# Altium PCB PCB1.PcbDoc
Units mm, origin at the board's own origin, x right, y up, seen from the top; angles counter-clockwise.
Board outline 51.05 x 60.58 mm, 2 copper layers (Top Layer, Bottom Layer); 14 components, 9 nets, 34 pads, 0 vias.
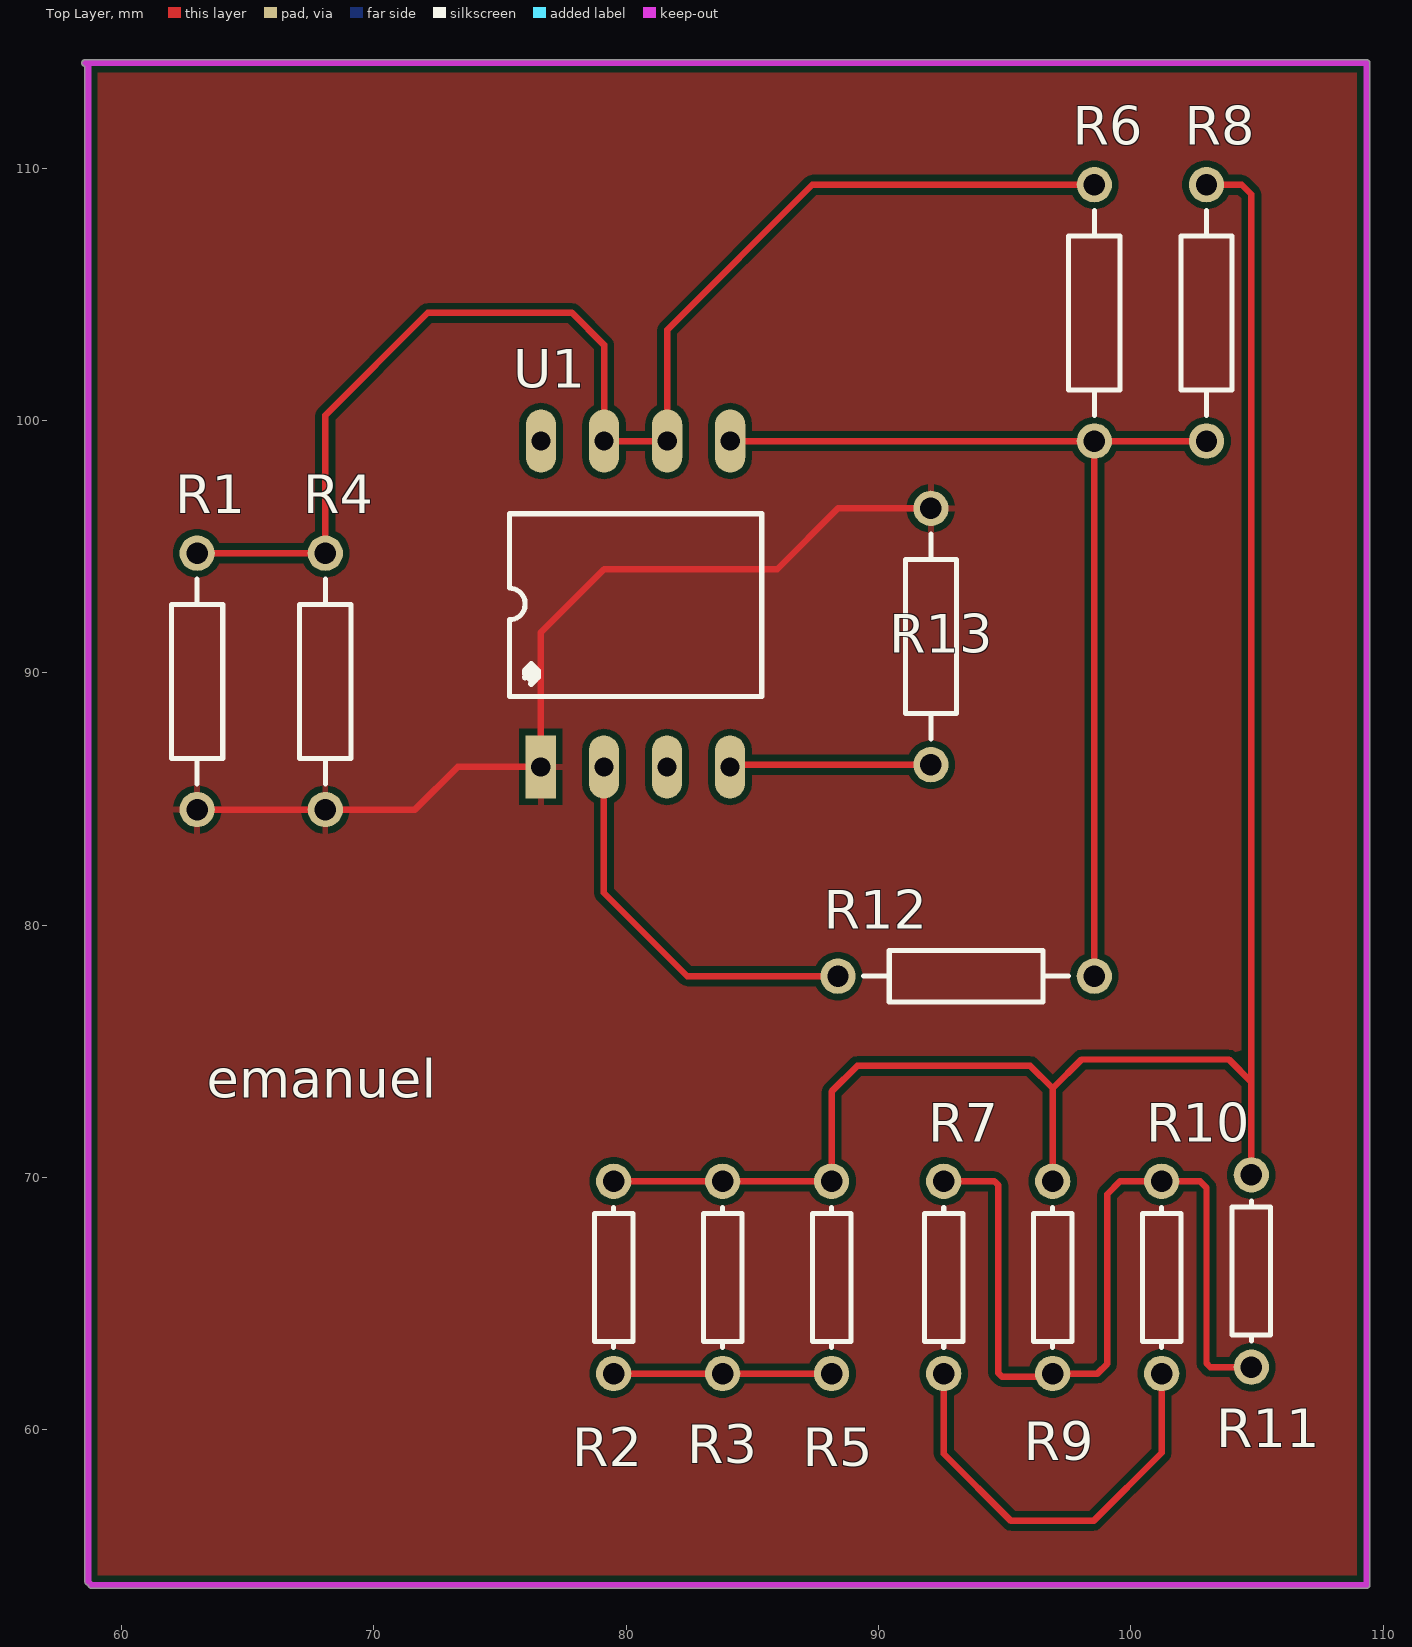
[diagram p0: Top Layer view]
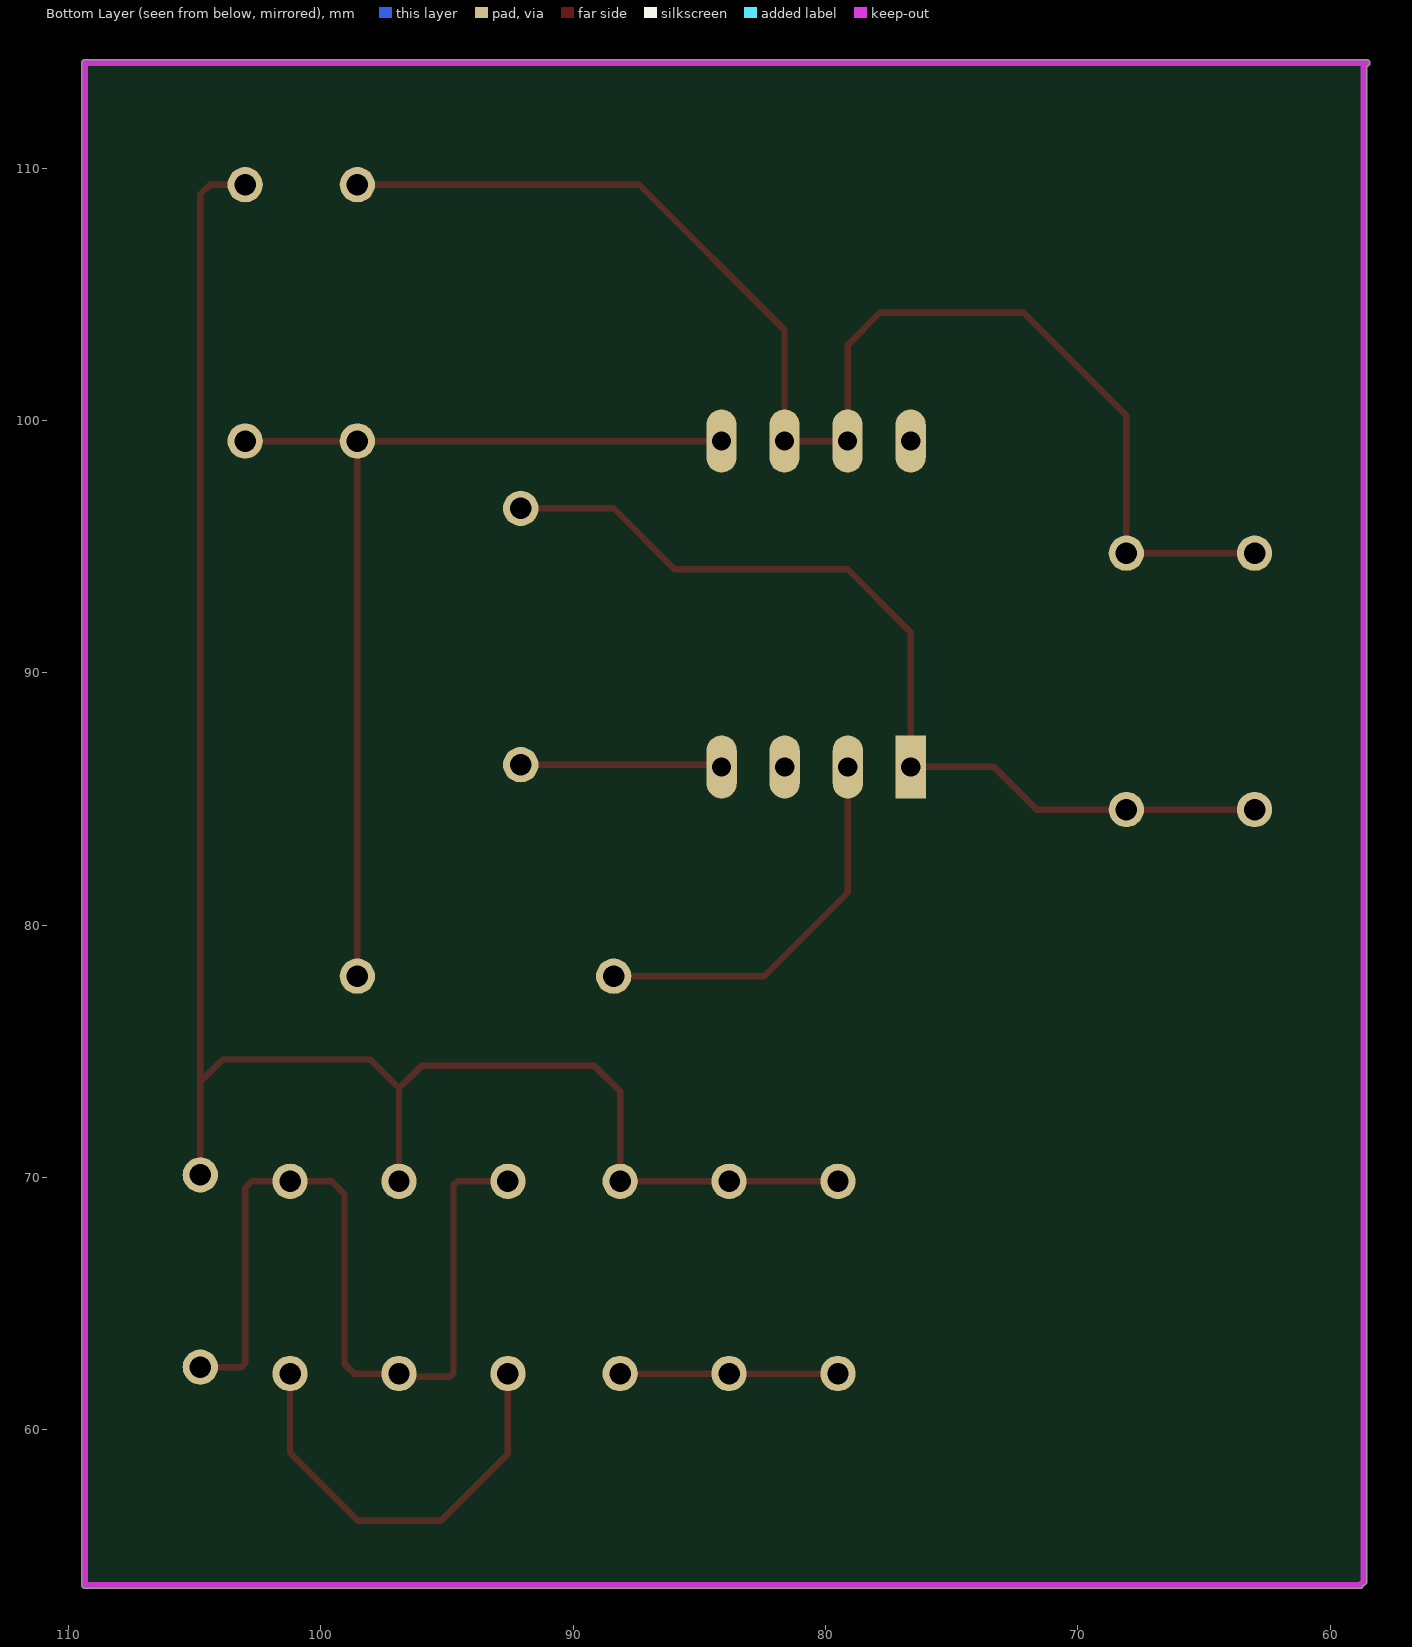
[diagram p1: Bottom Layer view, seen from below]

## Layer stack, top to bottom
Top Solder: solder mask 0.0102, Solder Resist, Dk 3.5
Top Layer: signal copper 0.0356
Dielectric 1: dielectric 0.32, FR-4, Dk 4.8
Bottom Layer: signal copper 0.0356
Bottom Solder: solder mask 0.0102, Solder Resist, Dk 3.5

## Board outline
58.547,53.975 58.547,114.046 cw(c58.547,114.173) 58.547,114.3 109.347,114.3 cw(c109.347,114.173) 109.474,114.173 109.474,53.848 cw(c109.347,53.848) 109.347,53.721 58.801,53.721 cw(c58.801,53.848) 58.674,53.848 cw(c58.674,53.975)

## Design rules (kind name [scope] priority, off if disabled: settings)
Clearance [All] p1: gap=0.254 ignorepadtopadclearanceinfootprint=FALSE
PolygonConnect [All] p1: connectstyle=Relief reliefconductorwidth=0.254 reliefentries=4 polygonreliefangle="90 Angle" airgapwidth=0.254
RoutingLayers [All] p1: top layer_v5=TRUE bottom layer_v5=FALSE
RoutingVias [All] p1: holewidth=0.711 width=1.27 viastyle="Through Hole" minholewidth=0.711 minwidth=1.27 maxholewidth=0.711 maxwidth=1.27
SolderMaskExpansion [All] p1: expansion=0.102 istentingtop=FALSE
SupplyNets "Schematic Supply Nets_1" [InNet('VCC')] p1: voltage=0.000
SupplyNets "Schematic Supply Nets" [InNet('GND')] p2: voltage=0.000
Width [All] p1: maxlimit=0.254 minlimit=0.254 preferedwidth=0.254
29 further rules are at their usual default settings.

## Classes and differential pairs
component class Designator: R1 R4 R6 R8 R12 R13 U1

## Components (designator, comment, footprint, x,y, rotation, side; value= is the part's Value field where it differs from the comment)
R1 "Res2" AXIAL-0.4 62.992,89.662 r90 top value=1K (schematic designator R11)
R2 "Res1" AXIAL-0.3 79.502,66.04 r90 top value=1K (schematic designator R7)
R3 "Res1" AXIAL-0.3 83.82,66.04 r90 top value=1K (schematic designator R6)
R4 "Res2" AXIAL-0.4 68.072,89.662 r90 top value=1K (schematic designator R10)
R5 "Res1" AXIAL-0.3 88.138,66.04 r90 top value=1K
R6 "Res2" AXIAL-0.4 98.552,104.267 r90 top value=1K (schematic designator R9)
R7 "R2" AXIAL-0.3 92.583,66.04 r90 top value=1K (schematic designator R4)
R8 "Res2" AXIAL-0.4 102.997,104.267 r90 top value=1K (schematic designator R56)
R9 "Res1" AXIAL-0.3 96.901,66.04 r90 top value=1K (schematic designator R3)
R10 "R1" AXIAL-0.3 101.219,66.04 r90 top value=1K (schematic designator R2)
R11 "Res1" AXIAL-0.3 104.775,66.294 r90 top value=1K (schematic designator R1)
R12 "Res2" AXIAL-0.4 93.472,77.978 r180 top value=1K
R13 "Res2" AXIAL-0.4 92.075,91.44 r90 top value=1K
U1 "lm555" DIP8 76.621,85.13 r90 top

## Footprints (in the part's own frame and the unit in brackets; to place one, negate y for a bottom-side part, rotate by r counter-clockwise, add the part's x,y. Pads: shape width x height; smd on the part's side, far side on the other; paste and mask are expansions set on the pad)
AXIAL-0.3 [mm] "Axial Device, Thru-Hole; 2 Leads; 0.3 in Pin Spacing"
  round 1.4 hole 0.85: 1(-3.81,0) 2(3.81,0)
  silkscreen extent -2.77,-0.76 2.77,0.76
AXIAL-0.4 [mm] "Axial Device, Thru-Hole; 2 Leads; 0.4 in Pin Spacing"
  round 1.4 hole 0.85: 1(-5.08,0) 2(5.08,0)
  silkscreen extent -4.06,-1.02 4.06,1.02
DIP8 [mm]
  rect 2.5x1.2 hole 0.762: 1(1.143,0.007)
  oval 2.5x1.2 hole 0.762: 2(1.143,-2.493) 3(1.143,-4.993) 4(1.143,-7.493) 5(14.057,-7.5) 6(14.057,-5) 7(14.057,-2.5) 8(14.057,0)
  silkscreen extent 3.94,-8.75 11.18,1.25

## Part data
R1 R2 R3 R4 R5 R6 R8 R9 R11 R12 R13: "Resistor", LatestRevisionDate=17-Jul-2002, LatestRevisionNote="Re-released for DXP Platform.", Published=8-Jun-2000, Publisher="Altium Limited"
  R1 R4 R6 R8 R12 R13: PackageDescription="Axial Device, Thru-Hole; 2 Leads; 0.4 in Pin Spacing", PackageReference=AXIAL-0.4
  R2 R3 R5 R9 R11: PackageDescription="Axial Device, Thru-Hole; 2 Leads; 0.3 in Pin Spacing", PackageReference=AXIAL-0.3
R7 R10: library part Res1, "Resistor", LatestRevisionDate=17-Jul-2002, LatestRevisionNote="Re-released for DXP Platform.", PackageDescription="Axial Device, Thru-Hole; 2 Leads; 0.3 in Pin Spacing", PackageReference=AXIAL-0.3, Published=8-Jun-2000, Publisher="Altium Limited"

## Nets (pads, with @x,y where several pads share a name; then routed paths per layer and width w, separated by ;. In a path a pad name is that pad's centre, name@x,y a point inside that pad or via, vN(x,y) a via of type N, cw(c..) or ccw(c..) an arc to the next point about the centre after c; other vN are vias at no path point)
GND: R1.1 R4.1 R13.2 U1.1 | length 37.1
  Top Layer w0.254: R1.1 66.929,84.582 R4.1 71.628,84.582 73.319,86.273 U1.1 76.614,91.6 79.121,94.107 85.979,94.107 88.392,96.52 R13.2
NetR1_2: R1.2 R4.2 R6.2 U1.6 U1.7 | length 53.8
  Top Layer w0.254: R1.2 R4.2 68.072,100.203 72.136,104.267 77.851,104.267 79.121,102.997 U1.7 U1.6 81.621,103.592 87.376,109.347 92.964,109.347 R6.2
NetR2_1: R2.1 R3.1 R5.1 | length 8.6
  Top Layer w0.254: R2.1 R3.1 R5.1
NetR2_2: R2.2 R3.2 R5.2 R8.2 R9.2 R11.2 | length 74.9
  Top Layer w0.254: R2.2 R3.2 R5.2 88.138,73.406 89.154,74.422 96.012,74.422 96.901,73.533 ; R9.2 96.901,73.533 ; R8.2 104.394,109.347 104.775,108.966 104.775,73.787 ; R11.2 104.775,73.787 ; 96.901,73.533 98.044,74.676 103.886,74.676 104.775,73.787
NetR7_1: R7.1 R10.1 | length 17.2
  Top Layer w0.254: R7.1 92.583,59.055 95.25,56.388 98.521,56.388 101.219,59.086 R10.1
NetR7_2: R7.2 R9.1 R10.2 R11.1 | length 34
  Top Layer w0.254: R7.2 94.593,69.85 94.742,69.701 94.742,62.252 94.891,62.103 96.774,62.103 R9.1 98.679,62.23 99.06,62.611 99.06,69.342 99.568,69.85 R10.2 102.743,69.85 102.997,69.596 102.997,62.633 103.146,62.484 R11.1
NetR12_2: R12.2 U1.2 | length 15.6
  Top Layer w0.254: U1.2 79.114,81.287 82.423,77.978 R12.2
NetR13_1: R13.1 U1.4 | length 8.1
  Top Layer w0.254: U1.4 84.201,86.36 R13.1 R13.1@92.115,86.32
VCC: R6.1 R8.1 R12.1 U1.5 | length 40.1
  Top Layer w0.254: U1.5 R6.1 ; R12.1 R6.1 ; R8.1 R6.1
pads on no net: U1.3 U1.8

## Polygon pours and split planes (outlines as drawn)
GND on Top Layer "GND_L01_P000" (solid, pour order 0): 58.674,114.173 109.22,114.173 109.347,114.046 109.347,53.848 58.801,53.848 58.674,53.975

## Keep-outs
Keep-Out Layer:
  lines w0.254: 58.547,114.173 109.347,114.173 109.347,53.848 58.801,53.848 58.674,53.975 58.674,114.173

## Silkscreen, mask and mechanical layers (free items; w line width, h text height)
Top Overlay:
  text "emanuel" at 63.373,73.152 h1.52